# Altium PCB DA14580.PcbDoc
Units mm, origin at the board's own origin, x right, y up, seen from the top; angles counter-clockwise.
Board outline 25.19 x 29.52 mm, 2 copper layers (Top Layer, Bottom Layer); 52 components, 34 nets, 171 pads, 20 vias.
Unrouted connection lines stored in the file: 93.
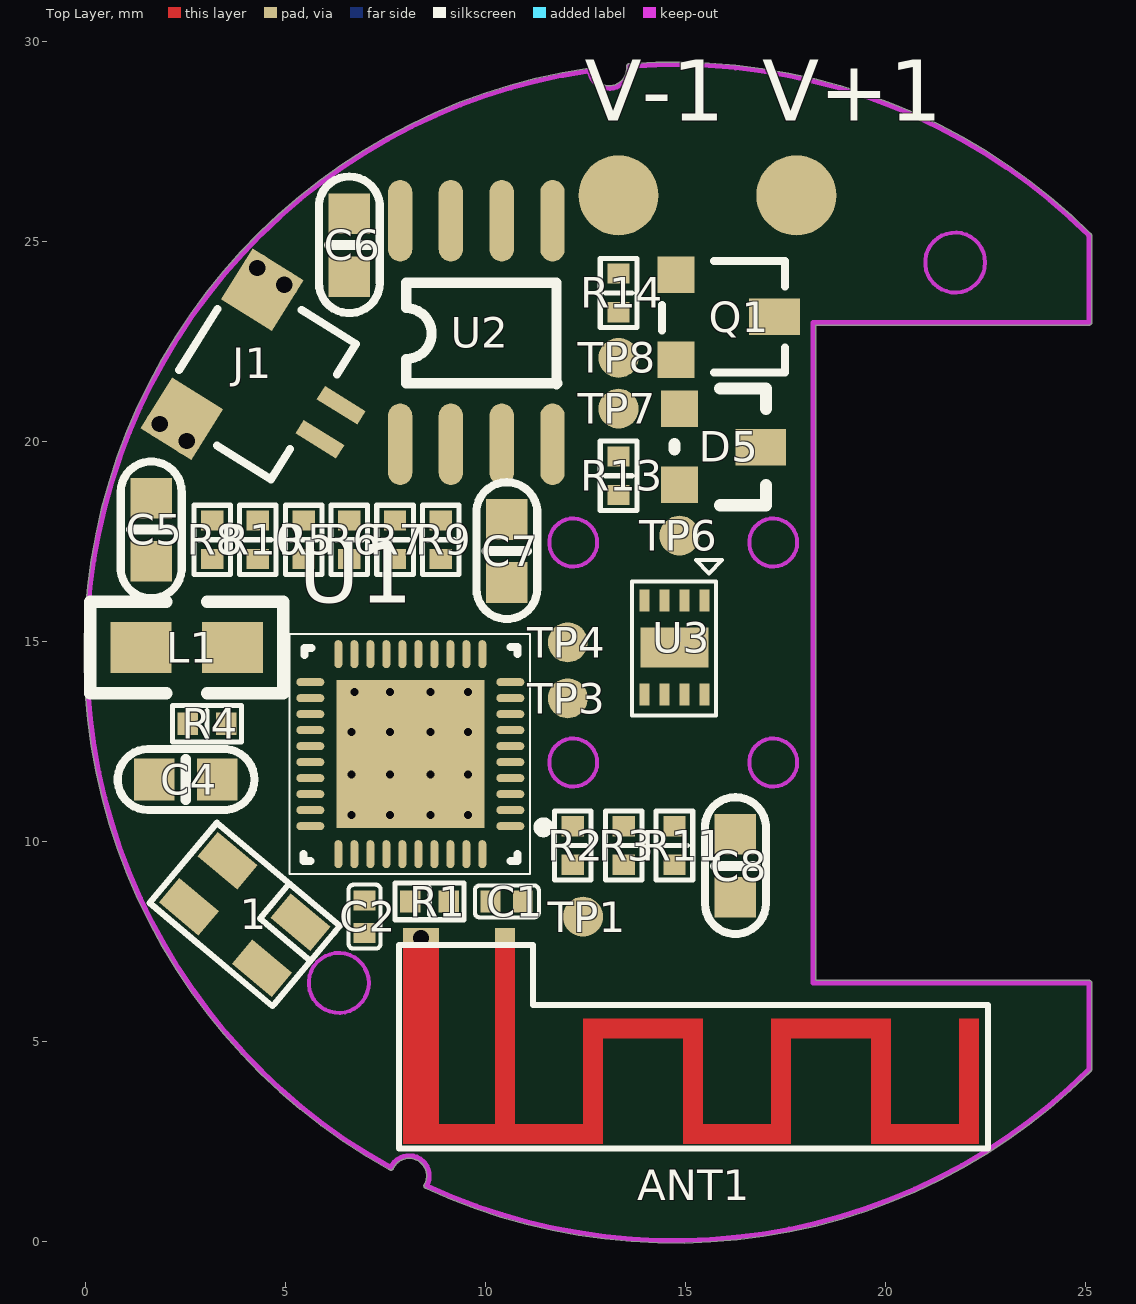
[diagram p0: Top Layer view]
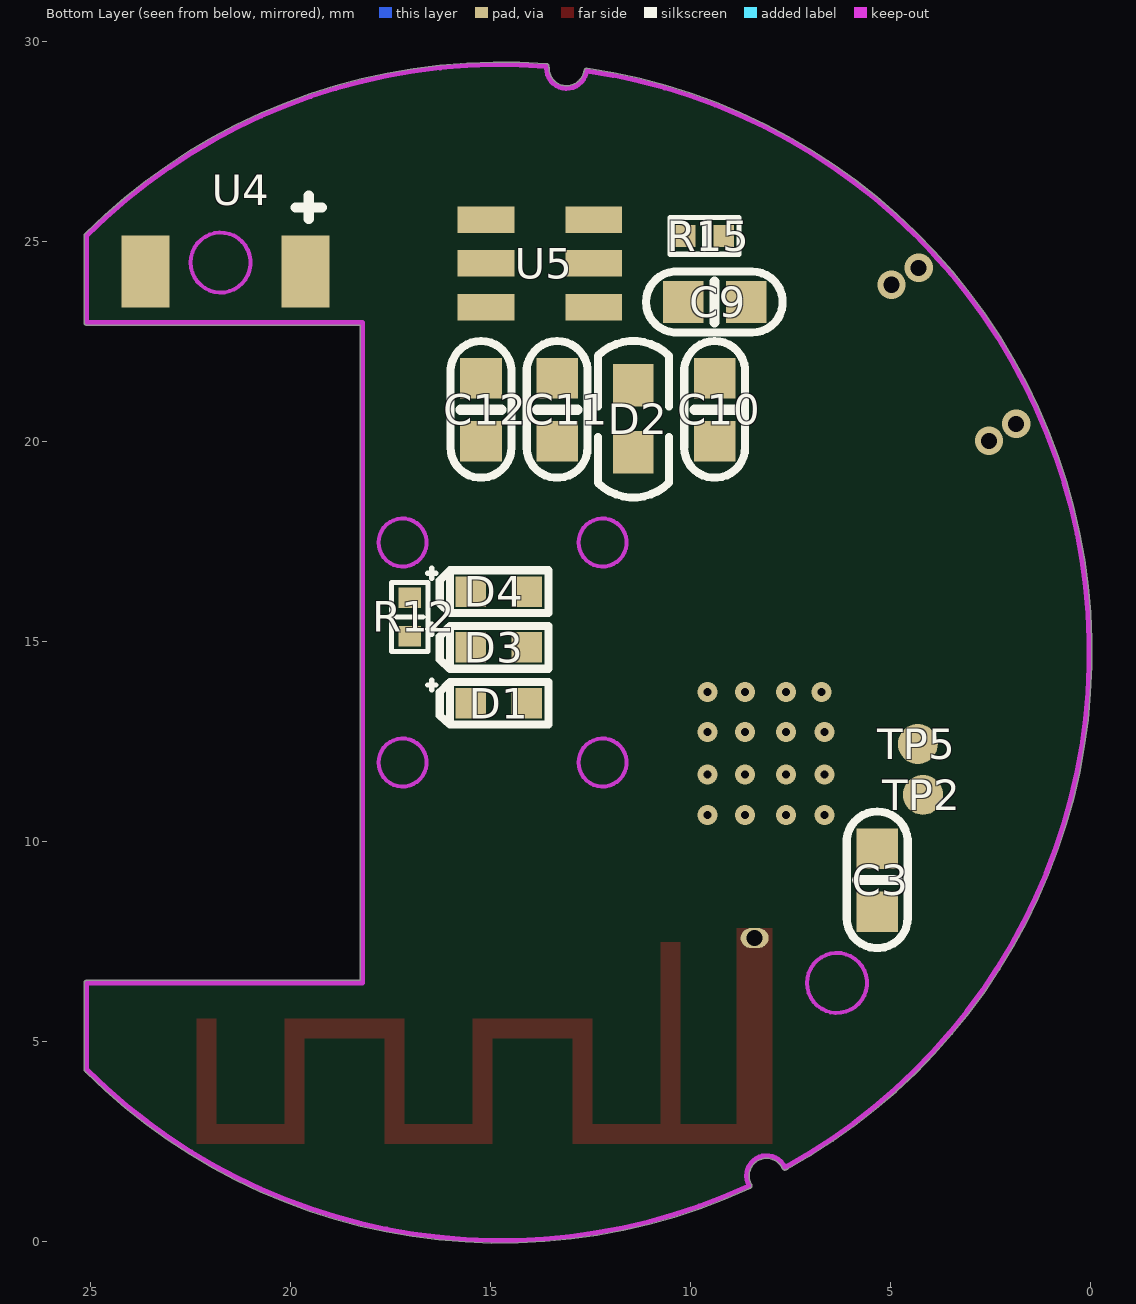
[diagram p1: Bottom Layer view, seen from below]

## Layer stack, top to bottom
Top Solder: solder mask 0.0102, Solder Resist, Dk 3.5
Top Layer: signal copper 0.0356
Dielectric 1: dielectric 0.32, FR-4, Dk 4.8
Bottom Layer: signal copper 0.0356
Bottom Solder: solder mask 0.0102, Solder Resist, Dk 3.5

## Board outline
8.527,1.337 cw(c8.533,1.401) 8.478,1.433 ccw(c8.1,1.651) 8.536,1.651 ccw(c8.1,1.651) 7.703,1.831 cw(c7.645,1.857) 7.6,1.811 cw(c7.605,1.875) 7.574,1.819 cw(c14.732,14.732) 12.585,29.339 cw(c12.595,29.276) 12.659,29.276 cw(c12.595,29.276) 12.658,29.266 cw(c12.614,29.22) 12.676,29.235 ccw(c13.1,29.337) 13.536,29.337 cw(c13.6,29.337) 13.544,29.368 cw(c13.604,29.389) 13.599,29.452 cw(c14.732,14.732) 25.135,25.208 cw(c25.09,25.163) 25.145,25.195 cw(c25.1,25.15) 25.164,25.15 25.164,22.982 cw(c25.1,22.982) 25.1,22.918 18.264,22.918 18.264,6.536 25.1,6.536 cw(c25.1,6.472) 25.164,6.472 cw(c25.1,6.472) 25.161,6.452 25.161,6.451 cw(c25.1,6.431) 25.164,6.431 25.164,4.313 cw(c25.1,4.313) 25.13,4.256 cw(c25.071,4.283) 25.116,4.237 cw(c14.732,14.732) 8.539,1.33 cw(c8.566,1.388)

## Design rules (kind name [scope] priority, off if disabled: settings)
Clearance [All] p1: gap=0.152 except(0.203: Arc-Via Track-Via SMDPad-Via THPad-Via Via-Via)
PolygonConnect PolygonConnect_1 [All] p1: connectstyle=Relief reliefconductorwidth=0.254 reliefentries=4 polygonreliefangle="90 Angle" airgapwidth=0.254
PolygonConnect [IsVia] p2: connectstyle=Direct reliefconductorwidth=0.254 reliefentries=4 polygonreliefangle="90 Angle" airgapwidth=0.254
RoutingVias [All] p1: holewidth=0.711 width=1.27 viastyle="Through Hole" minholewidth=0.711 minwidth=1.27 maxholewidth=0.711 maxwidth=1.27
SilkToSilkClearance [All] p1: silktosilkclearance=0
SilkToSolderMaskClearance [IsPad] p1: minsilkscreentomaskgap=0 clearancetoexposedcopper=TRUE
SolderMaskExpansion [All] p1: expansion=0.102
Width [All] p1: maxlimit=0.254 minlimit=0.254 preferedwidth=0.254
28 further rules are at their usual default settings.

## Components (designator, comment, footprint, x,y, rotation, side; value= is the part's Value field where it differs from the comment)
1 "CY_3225" CY_3225 4.621,7.238 r140 top
ANT1 "IPEX" IFA 8.4,7.594 r0 top
C1 "NC" C0402 10.541,8.509 r0 top
C2 "NC" C0402 6.985,8.128 r90 top
C3 "105K16V" C0603 5.334,9.042 r270 bottom
C4 "105K16V" C0603 2.515,11.557 r180 top
C5 "105K16V" C0603 1.651,17.805 r90 top
C6 "105K16V" C0603 6.604,24.917 r270 top
C7 "105K16V" C0603 10.541,17.272 r270 top
C8 "105K16V" C0603 16.256,9.398 r270 top
C9 "105K16V" C0603 9.398,23.495 r180 bottom
C10 "105K16V" C0603 9.398,20.803 r270 bottom
C11 "105K16V" C0603 13.335,20.803 r270 bottom
C12 "105K16V" C0603 15.24,20.803 r270 bottom
D1 "LED0603G" HS_0603D 14.795,13.462 r180 bottom
D2 "D-TVS" 0603C 11.43,19.739 r90 bottom
D3 "LED0603G" HS_0603D 14.795,14.859 r180 bottom
D4 "LED0603G" HS_0603D 14.795,16.256 r180 bottom
D5 "65Z5" U-SOT-23-3 14.859,20.828 r270 top
J1 "CON2" J-SH1.0-T-1-LT-2A 5.869,20.066 r58 top locked
L1 "2.2UH" 0805 3.683,14.859 r180 top
Q1 "AO3401 SOT-23" SOT23-AO3401 16.002,23.114 r270 top
R1 "10R" R0402 8.611,8.509 r180 top
R2 "4.7K" R0402 12.192,9.906 r270 top
R3 "4.7K" R0402 13.462,9.906 r270 top
R4 "1K" R0402 3.048,12.954 r180 top
R5 "3.6k" R0402 5.461,17.551 r270 top
R6 "4.3k" R0402 6.604,17.551 r270 top
R7 "10K" R0402 7.747,17.551 r270 top
R8 "710K" R0402 3.175,17.551 r270 top
R9 "10K" R0402 8.89,17.551 r270 top
R10 "7.15K" R0402 4.318,17.551 r270 top
R11 "50K" R0402 14.732,9.906 r270 top
R12 "1K" R0402 17.018,15.621 r90 bottom
R13 "1M" R0402 13.335,19.152 r90 top
R14 "1M" R0402 13.335,23.724 r90 top
R15 "2.2K" R0402 9.652,25.146 r0 bottom
TP1 "SIP1-1mm" "SIP - 1MM" 12.446,8.128 r90 top
TP2 "SIP1-1mm" "SIP - 1MM" 4.191,11.176 r90 bottom
TP3 "SIP1-1mm" "SIP - 1MM" 12.065,13.589 r90 top
TP4 "SIP1-1mm" "SIP - 1MM" 12.065,14.986 r90 top
TP5 "SIP1-1mm" "SIP - 1MM" 4.318,12.446 r90 bottom
TP6 "SIP1-1mm" "SIP - 1MM" 14.859,17.653 r90 top
TP7 "SIP1-1mm" "SIP - 1MM" 13.335,20.828 r90 top
TP8 "SIP1-1mm" "SIP - 1MM" 13.335,22.098 r90 top
U1 "DA14580" QFN40P500*500_HS-41N 10.628,10.392 r180 top
U2 "LM393" SO-8S 9.779,22.733 r90 top
U3 "SHT30" "SHT30 DL7DV9" 14.732,14.859 r270 top
U4 "BATTERY" "BAT 4mm" 19.622,24.257 r0 bottom
U5 "TP4067" SOT23-6 15.113,25.552 r90 bottom
V+1 "TP" SIP-2MM 17.78,26.162 r0 top
V-1 "TP" SIP-2MM 13.335,26.162 r0 top

## Footprints (in the part's own frame and the unit in brackets; to place one, negate y for a bottom-side part, rotate by r counter-clockwise, add the part's x,y. Pads: shape width x height; smd on the part's side, far side on the other; paste and mask are expansions set on the pad)
0603C [mil]
  rect 42x40 smd: 1(0,0) 2(66,0)
  silkscreen extent -44,-35 109,35
0805 [mil]
  rect 60x50 smd: 1(0,0) 2(90,0)
  silkscreen extent -50,-45 140,45
"BAT 4mm" [mm]
  rect 1.2x1.8 smd: 1(0,0) 2(4,0)
  silkscreen extent -0.41,-1.91 0.25,-1.32
C0402 [mil]
  rect 20x22 smd: 1(-16,0) 2(16,0)
  silkscreen extent -32,-16 32,16
C0603 [mil]
  rect 40x41 smd: 1(-31,0) 2(31,0)
  silkscreen extent -68,-30 67,30, body extent -30,-15 32,17, height 12
CY_3225 [mm]
  rect 1.3x0.8 smd: 1(-0.102,-1.067) 2(2.286,-1.067) 3(2.286,0.432) 4(-0.102,0.432)
  silkscreen extent -0.91,-1.63 3.1,0.99
HS_0603D [mil]
  rect 30x30 smd: 1(-27.5,0) 2(27.5,0)
  silkscreen extent -70,-21 49,23
IFA [mm]
  rect 0.5x0.5 smd mask+0.003: 1(2.1,0)
  rect 0.9x0.5 smd mask+0.003: 2(0,0)
  rect 0.9x0.5 on Top Solder mask+0.003: 2(0,0)
  oval 0.7x0.5 hole 0.4 mask+0.01: 2(0,0)
  rect 0.5x0.5 on Top Solder mask+0: ""(0.2,-4.9)
  rect 0.5x0.5 on Top Solder mask+0.003: ""(2.1,-4.4) ""(2.1,0) ""(4.3,-4.9) ""(4.3,-2.26) ""(6.8,-4.9) ""(6.8,-2.26) ""(9,-4.9) ""(9,-2.26) ""(11.5,-4.9) ""(11.5,-2.26) ""(13.7,-4.9) ""(13.7,-2.26)
  Top Layer region: 13.45,-2.01 13.45,-5.15 13.95,-5.15 13.95,-2.01
  Top Layer region: 11.25,-4.65 11.25,-5.15 13.95,-5.15 13.95,-4.65
  Top Layer region: 11.75,-2.51 11.75,-2.01 9.048,-2.01 9.048,-2.51
  Top Layer region: 11.25,-2.01 11.25,-5.15 11.75,-5.15 11.75,-2.01
  Top Layer region: 4.05,-2.01 4.05,-5.15 4.55,-5.15 4.55,-2.01
  Top Layer region: 1.849,-0.093 1.849,-4.9 2.35,-4.9 2.35,-0.093
  Top Layer region: -0.45,0.25 -0.45,-5.15 0.449,-5.15 0.449,0.25
  Top Layer region: 4.05,-2.01 4.05,-2.51 7.05,-2.51 7.05,-2.01
  Top Layer region: 6.549,-2.01 6.549,-5.15 7.051,-5.15 7.051,-2.01
  Top Layer region: 6.549,-4.65 6.549,-5.151 9.25,-5.151 9.25,-4.65
  Top Layer region: 8.75,-2.01 8.75,-5.15 9.25,-5.15 9.25,-2.01
  Top Layer lines w0.5: 0.2,-4.9 4.3,-4.9
  silkscreen extent -0.56,-5.26 14.17,-0.18
J-SH1.0-T-1-LT-2A [mm]
  rect 0.4x1.2 smd: 1(0,0) 2(1,0)
  rect 1.5x1.5 smd: 3(-1.4,3.2) 3(2.4,3.2)
  silkscreen extent -1.5,0.5 2.5,3.9
QFN40P500*500_HS-41N [mm] "QFN, 44-Leads, Body 5.00x5.00mm, Pitch 0.40mm, Thermal Pad 2.45x2.45mm, IPC Medium Density"
  oval 0.7x0.2 smd: 1(0,0) 2(0,-0.4) 3(0,-0.8) 4(0,-1.2) 5(0,-1.6) 6(0,-2) 7(0,-2.4) 8(0,-2.8) 9(0,-3.2) 10(0,-3.6) 21(5,-3.6) 22(5,-3.2) 23(5,-2.8) 24(5,-2.4) 25(5,-2) 26(5,-1.6) 27(5,-1.2) 28(5,-0.8) 29(5,-0.4) 30(5,0)
  oval 0.2x0.7 smd: 11(0.7,-4.3) 12(1.1,-4.3) 13(1.5,-4.3) 14(1.9,-4.3) 15(2.3,-4.3) 16(2.7,-4.3) 17(3.1,-4.3) 18(3.5,-4.3) 19(3.9,-4.3) 20(4.3,-4.3) 31(4.3,0.7) 32(3.9,0.7) 33(3.5,0.7) 34(3.1,0.7) 35(2.7,0.7) 36(2.3,0.7) 37(1.9,0.7) 38(1.5,0.7) 39(1.1,0.7) 40(0.7,0.7)
  rect 3.7x3.7 smd: 41(2.5,-1.8)
  silkscreen extent -0.95,-4.8 5.52,1.2
R0402 [mil]
  rect 20x22 smd: 1(-19,0) 2(19,0)
  silkscreen extent -34,-18 34,18
"SHT30 DL7DV9" [mm]
  rect 0.55x0.25 smd: 1(-1.175,0.75) 2(-1.175,0.25) 3(-1.175,-0.25) 4(-1.175,-0.75) 5(1.175,-0.75) 6(1.175,-0.25) 7(1.175,0.25) 8(1.175,0.75)
  rect 1x1.7 smd: 9(0,0)
  silkscreen extent -2.18,-1.07 1.7,1.19
"SIP - 1MM" [mm]
  round 1 smd: 1(0,0)
SIP-2MM [mm]
  round 2 smd: 0(0,0)
SO-8S [mil]
  oval 80x24 smd: 1(-110,75) 2(-110,25) 3(-110,-25) 4(-110,-75) 5(110,-75) 6(110,-25) 7(110,25) 8(110,75)
  silkscreen extent -51,-80 49,69
SOT23-6 [mil]
  rect 26x56 smd: 1(0,0) 2(-43,0) 3(-86,0) 4(-86,-106) 5(-43,-106) 6(0,-106)
SOT23-AO3401 [mil]
  rect 36x50 smd: D(-0.44,48.5)
  rect 36x36 smd: G(-42,-48.5) S(42,-48.5)
  silkscreen extent -55,-62 55,59
U-SOT-23-3 [mil]
  rect 36x36 smd: 1(0,0) 2(75,0)
  rect 36x50 smd: 3(38,80)
  silkscreen extent -20,-5 95,85, body extent -20,-10 95,90, height 50

## Part data
ANT1: library part J-IPEX
C1 C2: library part C0402X7R-101J10V, "贴片电容-陶瓷"
C3 C4 C5 C6 C7 C8 C9 C10 C11 C12: library part C0603X7R-105K16V, "贴片电容-陶瓷"
D1 D3 D4: library part DLED-0603-G, "贴片二极管-LED"
J1: "Connector"
L1: library part INDUCTOR
Q1: library part "2321 SOT-23", "MOS管"
R1 R2 R3 R4 R5 R6 R7 R8 R9 R10 R11 R12 R13 R14 R15: library part R0402-1KF, "贴片电阻-通用"
TP1 TP2 TP3 TP4 TP5 TP6 TP7 TP8: library part SIP1-2mm
U1: "bluetooth"

## Via types
v1: diameter 0.5, hole 0.2, Top Layer to Bottom Layer, 16 vias
v2: diameter 0.711, hole 0.406, Top Layer to Bottom Layer, 4 vias

## Nets (pads, with @x,y where several pads share a name; then routed paths per layer and width w, separated by ;. In a path a pad name is that pad's centre, name@x,y a point inside that pad or via, vN(x,y) a via of type N, cw(c..) or ccw(c..) an arc to the next point about the centre after c; other vN are vias at no path point)
GND: 1.2 1.4 ANT1.2@8.4,7.594 C1.2 C2.1 C3.1 C4.2 C5.2 C6.2 C7.2 C8.2 C9.2 C10.2 C11.2 C12.2 D1.2 D2.1 D5.1 J1.1 R5.2 R8.1 R10.1 R13.1 R15.1 TP7.1 U1.34 U1.41 U2.4 U3.7 U3.8 U4.2 U5.2 V-1.0
  other v1: 6.655,10.668 7.62,10.668 8.636,10.668 9.576,10.668 6.655,11.684 7.62,11.684 8.636,11.684 9.576,11.684 6.655,12.751 7.62,12.751 8.636,12.751 9.576,12.751 6.731,13.741 7.62,13.741 8.636,13.741 9.576,13.741
Net1_1: 1.1 U1.30
Net1_3: 1.3 U1.29
NetANT1_1: ANT1.1 C1.1 R1.1
NetC2_2: C2.2 R1.2 U1.35
NetC3_2: C3.2 U1.31
NetC4_1: C4.1 U1.23
NetC5_1: C5.1 L1.2 U1.19
NetC6_1: C6.1 U2.8
NetC7_1: C7.1 J1.2 R9.1 U2.3
NetC11_1: C11.1 C12.1 D5.2 TP6.1 U4.1 U5.3
NetD1_1: D1.1 R4.2
NetD3_1: D3.1 D4.1 R12.1
NetD3_2: D3.2 U5.5
NetD4_2: D4.2 U5.1
NetD5_3: D5.3 Q1.S R14.1
NetL1_1: L1.1 U1.21
NetQ1_G: Q1.G R14.2
NetR4_1: R4.1 U1.22
NetR5_1: R5.1 R6.1 U2.2
NetR7_1: R7.1 U2.1
NetR8_2: R8.2 U1.17
NetR10_2: R10.2 U1.14 U1.15
NetR11_1: R11.1 U3.6
NetR13_2: R13.2 TP8.1
NetR15_2: R15.2 U5.6
NetTP1_1: TP1.1 U1.39
NetTP2_1: TP2.1 U1.26
NetTP3_1: TP3.1 U1.6
NetTP4_1: TP4.1 U1.7
NetTP5_1: TP5.1 U1.25
SCLK: R2.1 U1.3 U3.4
SDA: R3.1 U1.4 U3.1
VCC: C8.1 C9.1 C10.1 D2.2 Q1.D R2.2 R3.2 R6.2 R7.2 R9.2 R11.2 R12.2 U3.5 U5.4 V+1.0
pads on no net: ANT1. ANT1.2@8.4,7.594 J1.3 U1.1 U1.2 U1.5 U1.8 U1.9 U1.10 U1.11 U1.12 U1.13 U1.16 U1.18 U1.20 U1.24 U1.27 U1.28 U1.32 U1.33 U1.36 U1.37 U1.38 U1.40 U2.5 U2.6 U2.7 U3.2 U3.3 U3.9
copper on no net:
  other v2: 2.54,20.023 1.862,20.447 4.978,23.924 4.299,24.348

## Keep-outs
Keep-Out Layer:
  circle w0.1: c12.2,11.982 r0.6
  circle w0.1: c12.2,17.482 r0.6
  circle w0.1: c17.2,11.982 r0.6
  circle w0.1: c17.2,17.482 r0.6
  circle w0.1: c6.34,6.472 r0.75
  circle w0.1: c21.75,24.482 r0.75
  lines w0.127: 7.605,1.875 cw(c14.732,14.732) 12.595,29.276 ; 7.645,1.857 cw(c8.1,1.651) 8.533,1.401 ; 8.566,1.388 ccw(c14.732,14.732) 25.071,4.283 ; 12.614,29.22 ccw(c13.1,29.337) 13.6,29.337 ; 13.604,29.389 cw(c14.732,14.732) 25.09,25.163 ; 18.2,6.472 25.1,6.472 ; 18.2,6.482 18.2,14.732 18.2,22.982 25.1,22.982 25.1,25.15 ; 25.1,4.313 25.1,6.431